# Altium PCB PCB1.PcbDoc
Units mil, origin at the board's own origin, x right, y up, seen from the top; angles counter-clockwise.
Board outline 4255 x 2150 mil, 2 copper layers (Top Layer, Bottom Layer); 68 components, 50 nets, 173 pads, 46 vias.
Unrouted connection lines stored in the file: 1.
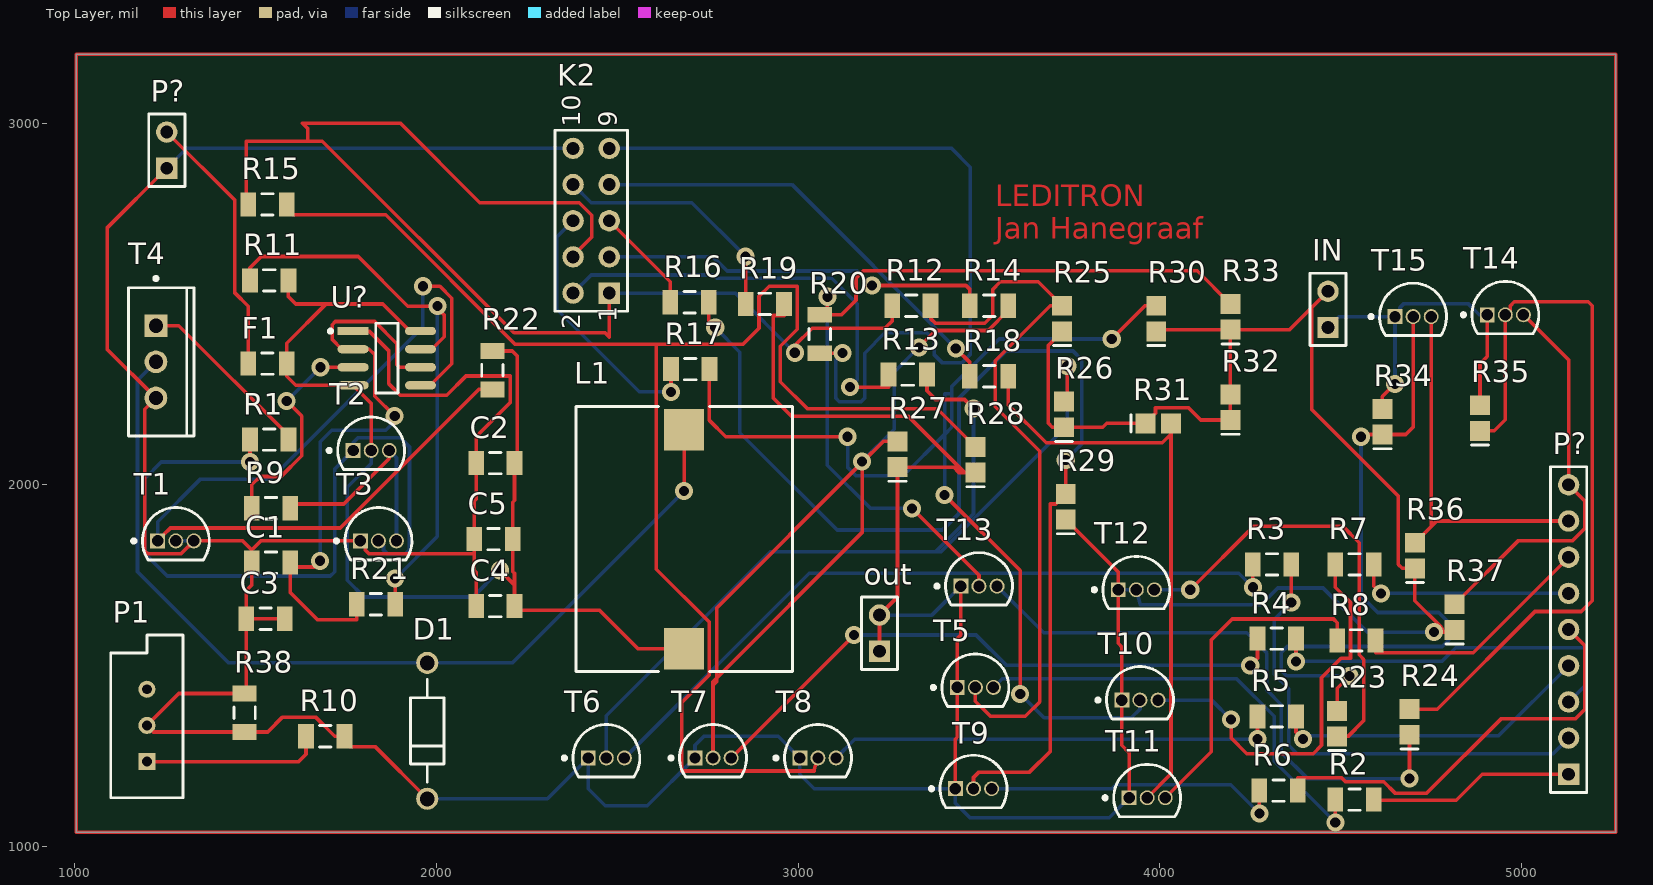
[diagram p0: Top Layer view]
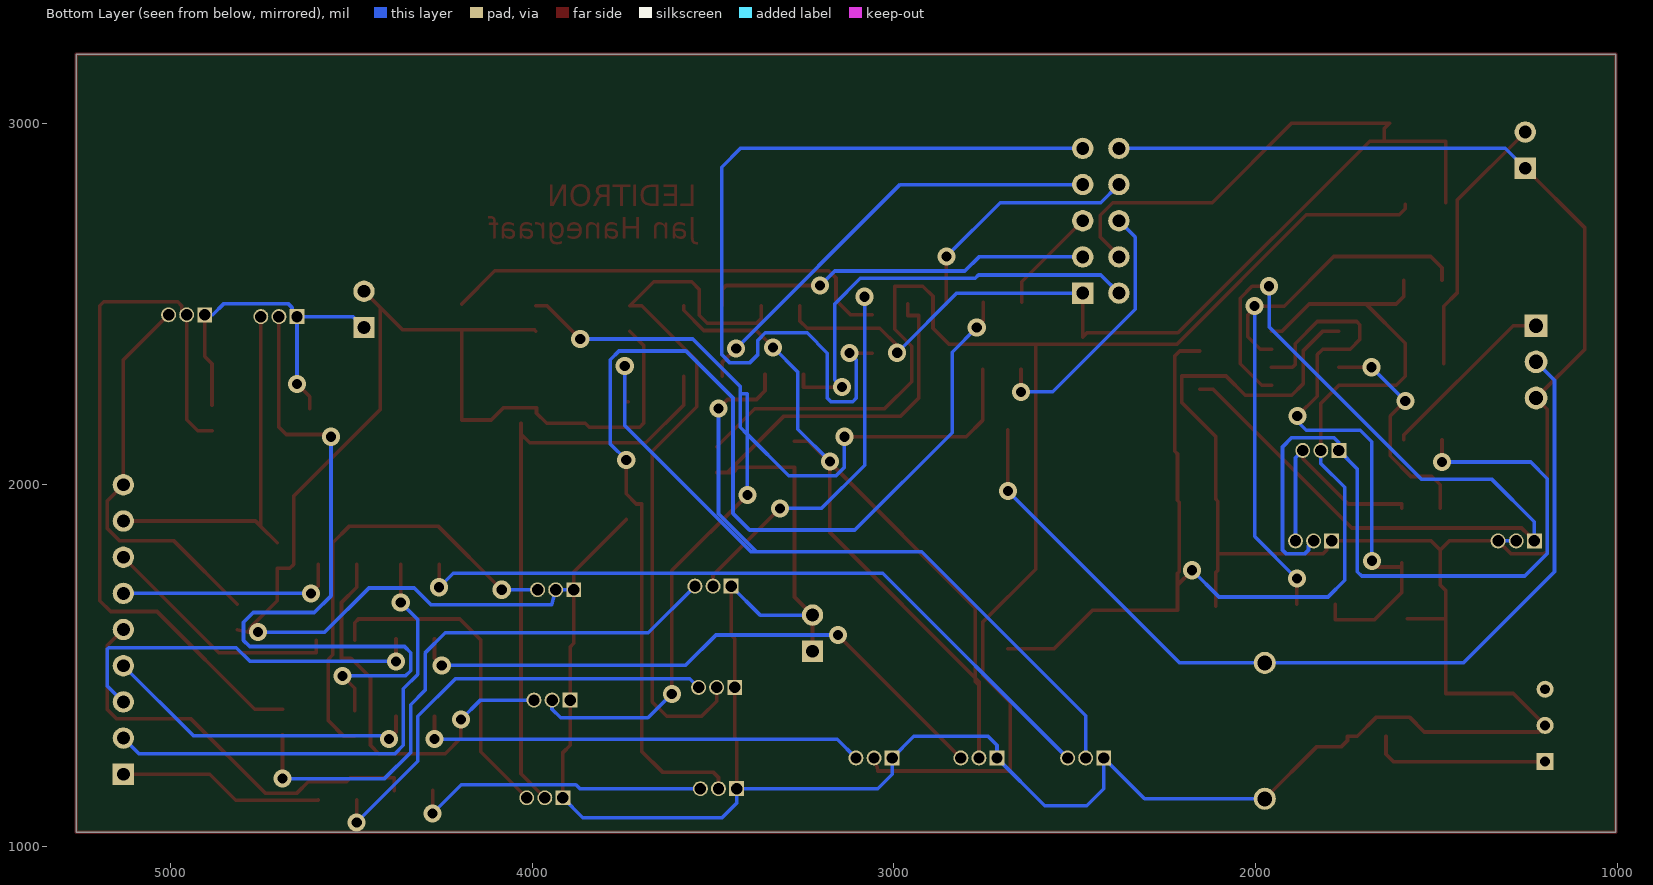
[diagram p1: Bottom Layer view, seen from below]

## Layer stack, top to bottom
Top Solder: solder mask 0.4, Solder Resist, Dk 3.5
Top Layer: signal copper 1.4
Dielectric 1: dielectric 12.6, FR-4, Dk 4.8
Bottom Layer: signal copper 1.4
Bottom Solder: solder mask 0.4, Solder Resist, Dk 3.5

## Board outline
1005,1040 1005,3190 5260,3190 5260,1040

## Design rules (kind name [scope] priority, off if disabled: settings)
Clearance [All] p1: gap=10 ignorepadtopadclearanceinfootprint=FALSE except(0: Arc-Hole Track-Hole SMDPad-Hole THPad-Hole Via-Hole Fill-Hole Poly-Hole Region-Hole Text-Hole)
PolygonConnect [All] p1: connectstyle=Relief reliefconductorwidth=10 reliefentries=4 polygonreliefangle="90 Angle" airgapwidth=10
RoutingVias [All] p1: holewidth=28 width=50 viastyle="Through Hole" minholewidth=28 minwidth=50 maxholewidth=28 maxwidth=50
SolderMaskExpansion [All] p1: expansion=4 istentingtop=FALSE
Width [All] p1: maxlimit=10 minlimit=10 preferedwidth=10
30 further rules are at their usual default settings.

## Classes and differential pairs
component class boosterdeel2: IN K2 P? R2 R3 R4 R5 R6 R7 R8 R12 R13 R14 R15 R16 R17 R18 R19 R20 R23 R24 R25 R26 R27 R28 R29 R30 R31 R32 R33 R34 R35 R36 R37 T5 T6 T7 T8 T9 T10 T11 T12 T13 T14 T15
component class booster12-70v: C1 C2 C3 C4 C5 D1 F1 L1 out P1 P? R1 R9 R10 R11 R21 R22 R38 T1 T2 T3 T4 U?

## Components (designator, comment, footprint, x,y, rotation, side; value= is the part's Value field where it differs from the comment)
C1 "Cap Semi" C1206 1543.15,1785 r0 top value=330p
C2 "Cap Semi" C1206 2163.15,2060 r0 top value=100n
C3 "Cap Semi" C1206 1528.15,1630 r0 top value=4u7
C4 "Cap Semi" C1206 2163.15,1665 r0 top value=470u
C5 "Cap Semi" C1206 2158.15,1850 r0 top value=470u
D1 "MUR160G" ONSC-AXIAL_LEAD-2-59-10_P 1975,1320 r90 top
F1 "Fuse 1" C1206 1533.15,2335 r0 top
IN "Header 2" HDR1X2 4465,2435 r90 top
K2 "Header 5X2" HDR2X5 2478.15,2530 r90 top
L1 "74459147" WE-PD3-X 2685,1850 r90 top
out "Header 2" HDR1X2 3225,1540 r90 top
P1 "RPot" VR5 1200,1335 r90 top value=5k
P? "Header 2" HDR1X2 1255,2875 r90 top
P? "Header 9" HDR1X9 5130,1200 r90 top
R1 "Res1" C1206 1538.15,2125 r0 top value=1K
R2 "Res1" C1206 4538.15,1130 r0 top value=1K
R3 "Res1" C1206 4310,1780 r0 top value=1K
R4 "Res1" C1206 4323.15,1575 r0 top value=1K
R5 "Res1" C1206 4323.15,1360 r0 top value=1K
R6 "Res1" C1206 4328.15,1155 r0 top value=1K
R7 "Res1" C1206 4538.15,1780 r0 top value=1K
R8 "Res1" C1206 4543.15,1570 r0 top value=1K
R9 "Res1" C1206 1543.15,1935 r0 top value=2k2
R10 "Res1" C1206 1693.15,1305 r0 top value=2k2
R11 "Res1" C1206 1538.15,2565 r0 top value=3k3
R12 "Res1" C1206 3313.15,2495 r0 top value=1K
R13 "Res1" C1206 3303.15,2305 r0 top value=1K
R14 "Res1" C1206 3528.15,2495 r0 top value=1K
R15 "Res1" C1206 1533.15,2775 r0 top value=1K
R16 "Res1" C1206 2700,2504.68 r0 top value=1K
R17 "Res1" C1206 2701.85,2320 r0 top value=1K
R18 "Res1" C1206 3528.15,2300 r0 top value=1K
R19 "Res1" C1206 2908.15,2500 r0 top value=1K
R20 "Res1" C1206 3060,2416.85 r90 top value=1K
R21 "Res1" C1206 1833.15,1670 r0 top value=27k
R22 "Res1" C1206 2155,2316.85 r90 top value=27k
R23 "Res1" C2512 4490,1340 r90 top value=1K
R24 "Res1" C2512 4690,1344.57 r90 top value=1K
R25 "Res1" C2512 3730,2459.57 r90 top value=1K
R26 "Res1" C2512 3735,2194.57 r90 top value=1K
R27 "Res1" C2512 3275,2084.57 r90 top value=1K
R28 "Res1" C2512 3490,2069.57 r90 top value=1K
R29 "Res1" C2512 3740,1939.57 r90 top value=1K
R30 "Res1" C2512 3990,2459.57 r90 top value=1K
R31 "Res1" C2512 3995.43,2170 r0 top value=1K
R32 "Res1" C2512 4195,2214.57 r90 top value=1K
R33 "Res1" C2512 4195,2464.57 r90 top value=1K
R34 "Res1" C2512 4615,2174.57 r90 top value=1K
R35 "Res1" C2512 4885,2184.57 r90 top value=1K
R36 "Res1" C2512 4705,1804.57 r90 top value=1K
R37 "Res1" C2512 4815,1634.57 r90 top value=1K
R38 "Res1" C1206 1470,1370 r90 top value=390k
T1 "BC547B" ONSC-TO-92-3-29-11 1280,1845 r0 top
T2 "BC639" ONSC-TO-92-3-29-11 1820,2095 r0 top
T3 "BC640-016G" ONSC-TO-92-3-29-11 1840,1845 r0 top
T4 "IPP200N15N3 G" INF-PG-TO220-3-1_A_V 1225,2340 r0 top
T5 "MPSA42" ONSC-TO-92-3-29-11 3490,1440 r0 top
T6 "MPSA42" ONSC-TO-92-3-29-11 2470,1245 r0 top
T7 "MPSA42" ONSC-TO-92-3-29-11 2765,1245 r0 top
T8 "MPSA42" ONSC-TO-92-3-29-11 3055,1245 r0 top
T9 "MPSA42" ONSC-TO-92-3-29-11 3485,1160 r0 top
T10 "MPSA42" ONSC-TO-92-3-29-11 3945,1405 r0 top
T11 "MPSA42" ONSC-TO-92-3-29-11 3965,1135 r0 top
T12 "MPSA42" ONSC-TO-92-3-29-11 3935,1710 r0 top
T13 "MPSA42" ONSC-TO-92-3-29-11 3500,1720 r0 top
T14 "MPSA92" ONSC-TO-92-3-29-11 4955,2470 r0 top
T15 "MPSA92" ONSC-TO-92-3-29-11 4700,2465 r0 top
U? "ICM7555CBAZ-T" FP-M8_15-IPC_B 1863.15,2350 r0 top

## Footprints (in the part's own frame and the unit in brackets; to place one, negate y for a bottom-side part, rotate by r counter-clockwise, add the part's x,y. Pads: shape width x height; smd on the part's side, far side on the other; paste and mask are expansions set on the pad)
C1206 [mm] "Chip Capacitor, Body 3.2x1.6mm, IPC High Density"
  rect 1.1x1.7 smd: 1(-1.35,0) 2(1.35,0)
  silkscreen extent -0.4,-0.75 0.4,0.75, body extent -1.7,-0.9 1.7,0.9, height 1.3
C2512 [mm] "Chip Capacitor, Body 2.54x1.27mm, IPC High Density"
  rect 1.4x1.4 smd: 1(-0.9,0) 2(0.9,0)
  silkscreen extent -1.9,-0.6 -1.9,0.6, body extent -1.45,-0.82 1.45,0.82, height 1.3
FP-M8_15-IPC_B [mil]
  rect 85.59x22.97 smd paste+0 mask+0: 1(-93.15,75)
  rrect100% 85.59x22.97 smd paste+0 mask+0: 2(-93.15,25) 3(-93.15,-25) 4(-93.15,-75) 5(93.15,-75) 6(93.15,-25) 7(93.15,25) 8(93.15,75)
  silkscreen extent -161,-96 31,96, body extent -146,-106 146,106, height 10
HDR1X2 [mm] "Connector; Header; 2 Position"
  rect 1.5x1.5 hole 0.9: 1(0,0)
  round 1.5 hole 0.9: 2(2.54,0)
  silkscreen extent -1.27,-1.27 3.81,1.27
HDR1X9 [mm] "Connector; Header; 9 Position"
  rect 1.5x1.5 hole 0.9: 1(0,0)
  round 1.5 hole 0.9: 2(2.54,0) 3(5.08,0) 4(7.62,0) 5(10.16,0) 6(12.7,0) 7(15.24,0) 8(17.78,0) 9(20.32,0)
  silkscreen extent -1.27,-1.27 21.59,1.27
HDR2X5 [mm] "Connector; Header; 5x2 Position"
  rect 1.5x1.5 hole 0.9: 1(0,0)
  round 1.5 hole 0.9: 2(0,2.54) 3(2.54,0) 4(2.54,2.54) 5(5.08,0) 6(5.08,2.54) 7(7.62,0) 8(7.62,2.54) 9(10.16,0) 10(10.16,2.54)
  silkscreen extent -1.27,-1.27 11.43,3.81
INF-PG-TO220-3-1_A_V [mm] "FM, 3-Leads, Body 10.03x8.98mm, Pitch 2.54mm"
  rect 1.6x1.6 hole 1: 1(0,2.54)
  round 1.6 hole 1: 2(0,0) 3(0,-2.54)
  silkscreen extent -1.93,-5.2 2.67,5.97, body extent -1.93,-5.2 2.67,5.2, height 20.75
ONSC-AXIAL_LEAD-2-59-10_P [mm] "AXIAL, 2-Leads, Diameter 2.35mm"
  round 1.55 hole 1.05: 1(-4.77,0) 2(4.77,0)
  silkscreen extent -3.6,-1.18 3.6,1.18
ONSC-TO-92-3-29-11 [mm] "TO, 3-Leads, Body Dia 4.7mm, Pitch 1.27mm"
  rect 1.05x1.05 hole 0.8: 1(-1.27,0)
  round 1.05 hole 0.8: 2(0,0) 3(1.27,0)
  silkscreen extent -3.07,-1.34 2.35,2.35, body extent -2.35,-1.33 2.36,2.36, height 7.87
VR5 [mm] "Thru-Hole; 3 Leads"
  rect 1.2x1.2 hole 0.7: 1(-2.54,0)
  round 1.2 hole 0.7: 2(0,0) 3(2.54,0)
  silkscreen extent -5.08,-2.54 6.35,2.54
WE-PD3-X [mm] "SMD Inductor, 2-Leads, Body 18.54 x 15.24 mm"
  rect 2.92x2.79 smd: 1(-7.685,0) 2(7.685,0)
  silkscreen extent -9.3,-7.6 9.3,7.6, body extent -9.27,-7.64 9.27,7.6, height 7.61

## Part data
C1 C2 C3 C4 C5: "Capacitor (Semiconductor SIM Model)", LatestRevisionDate=29-May-2009, LatestRevisionNote="IPC-7351 Footprint Added.", PackageDescription="Chip Capacitor", PackageReference=C1206, Published=8-Jun-2000, Publisher="Altium Limited"
D1: library part CMP-0902-00129-1, "SWITCHMODE(TM) Power Rectifier, 2-Pin Axial_Lead, Pb-Free, Bulk Bag", Manufacturer="On Semiconductor", ComponentLink1Description="Manufacturer URL", ComponentLink1URL=http://www.onsemi.com/, ComponentLink2Description=Datasheet, ComponentLink2URL=http://www.onsemi.com/pub_link/Collateral/MUR120-D.PDF, ComponentLink3Description="Package Specification", ComponentLink3URL=http://www.onsemi.cn/pub_link/Collateral/59-10.PDF, DatasheetVersion="Rev. 12", IFSM Max (A)=35, Mounting Technology="Through Hole", PackageDescription="2-Pin, Axial Lead, Diameter 2.35 mm", PackageReference=AXIAL_LEAD-2-59-10, PackageVersion="Rev. U, 02/2005", Packing="Bulk Bag", PartNumber=MUR160G, RoHS=TRUE, Type=Ultrafast, VRRM Max (V)=600
F1: "Fuse", LatestRevisionDate=17-Jul-2002, LatestRevisionNote="Re-released for DXP Platform.", PackageDescription="Thru-Hole; 2 Leads", PackageReference=PIN-W2/E2.8, Published=8-Jun-2000, Publisher="Altium Limited"
IN out P?: "Header, 2-Pin", LatestRevisionDate=17-Jul-2002, LatestRevisionNote="Re-released for DXP Platform.", Publisher="Altium Limited"
K2: "Header, 5-Pin, Dual row", LatestRevisionDate=17-Jul-2002, LatestRevisionNote="Re-released for DXP Platform.", Publisher="Altium Limited"
L1: library part CMP-0227-00841-1, "SMD Shielded Power Inductor WE-PD3, L = 47.0 µH", Inductance="47.0 ÂµH", ComponentLink1Description="Manufacturer Link", ComponentLink1URL=http://www.we-online.com, ComponentLink2Description=Datasheet, ComponentLink2URL=http://www.we-online.de/katalog/media/pdf/74459147.pdf, DatasheetVersion="ver 1, Oct-2004", PackageDescription="SMD Inductor, 2-Leads, Body 18.54 x 15.24 mm", PackageReference=WE-PD3-X, PackageVersion=2004
P1: "Potentiometer", LatestRevisionDate=17-Jul-2002, LatestRevisionNote="Re-released for DXP Platform.", PackageDescription="Variable Resistor, Thru-Hole; 3 Leads", PackageReference=VR5, Published=8-Jun-2000, Publisher="Altium Limited", Set Position=0.5, Sim Note="Enter the Resistance value and the set point into parameter fields."
P?: "Header, 9-Pin", LatestRevisionDate=17-Jul-2002, LatestRevisionNote="Re-released for DXP Platform.", Publisher="Altium Limited"
R1 R2 R3 R4 R5 R6 R7 R8 R9 R10 R11 R12 R13 R14 R15 R16 R17 R18 R19 R20 R21 R22 R23 R24 R25 R26 R27 R28 R29 R30 R31 R32 R33 R34 R35 R36 R37 R38: "Resistor", LatestRevisionDate=17-Jul-2002, LatestRevisionNote="Re-released for DXP Platform.", PackageDescription="Axial Device, Thru-Hole; 2 Leads; 0.3 in Pin Spacing", PackageReference=AXIAL-0.3, Published=8-Jun-2000, Publisher="Altium Limited"
T1: library part CMP-1048-01467-1, "Amplifier Transistor, NPN Silicon, 3-Pin TO-92, Bulk Box", Manufacturer="On Semiconductor", ComponentLink1Description="Manufacturer URL", ComponentLink1URL=http://www.onsemi.com/, ComponentLink2Description=Datasheet, ComponentLink2URL=http://www.onsemi.com/pub_link/Collateral/BC546-D.PDF, ComponentLink3Description="Package Specification", ComponentLink3URL=http://www.onsemi.cn/pub_link/Collateral/2N6426-D.PDF, DatasheetVersion="Rev. 7", fT Min (MHz)=150, IC Continuous (A)=0.1, Mounting Technology="Through Hole", PackageDescription="3-Pin Transistor Outline, Body 4.825 x 3.685 mm, Pitch 1.27 mm", PackageReference=TO-92-3-29-11_AM_SL, PackageVersion="Rev. AM", Packing="Bulk Box", PartNumber=BC547B, Polarity=NPN, RoHS=FALSE
T2: library part CMP-1048-01471-1, "High Current Transistor, NPN Silicon, 3-Pin TO-92, Bulk Box", Manufacturer="On Semiconductor", ComponentLink1Description="Manufacturer URL", ComponentLink1URL=http://www.onsemi.com/, ComponentLink2Description=Datasheet, ComponentLink2URL=http://www.onsemi.com/pub_link/Collateral/BC635-D.PDF, ComponentLink3Description="Package Specification", ComponentLink3URL=http://www.onsemi.cn/pub_link/Collateral/2N6426-D.PDF, DatasheetVersion="Rev. 1", IC Continuous (A)=1, Mounting Technology="Through Hole", PackageDescription="3-Pin Transistor Outline, Body 4.825 x 3.685 mm, Pitch 1.27 mm", PackageReference=TO-92-3-29-11_AM_SL, PackageVersion="Rev. AM", Packing="Bulk Box", PartNumber=BC639, Polarity=NPN, RoHS=FALSE
T3: library part CMP-1048-01475-1, "High Current Transistor, PNP Silicon, 3-Pin TO-92, Pb-Free, Bulk Box", Manufacturer="On Semiconductor", ComponentLink1Description="Manufacturer URL", ComponentLink1URL=http://www.onsemi.com/, ComponentLink2Description=Datasheet, ComponentLink2URL=http://www.onsemi.com/pub_link/Collateral/BC640-D.PDF, ComponentLink3Description="Package Specification", ComponentLink3URL=http://www.onsemi.cn/pub_link/Collateral/2N6426-D.PDF, DatasheetVersion="Rev. 1", IC Continuous (A)=-0.5, Mounting Technology="Through Hole", PackageDescription="3-Pin Transistor Outline, Body 4.825 x 3.685 mm, Pitch 1.27 mm", PackageReference=TO-92-3-29-11_AM_SL, PackageVersion="Rev. AM", Packing="Bulk Box", PartNumber=BC640-016G, Polarity=PNP, RoHS=TRUE
T4: library part CMP-1091-00080-1, "N-Channel OptiMOS 3 Power-Transistor, 150 V VDS, 50 A ID, -55 to 175 degC, PG-TO220-3-1, Tube, Green", Manufacturer=Infineon, ComponentLink1Description="Manufacturer URL", ComponentLink1URL=http://www.infineon.com/, ComponentLink2Description=Datasheet, ComponentLink2URL=http://www.infineon.com/dgdl/IPD200N15N3_Rev25.pdf?folderId=db3a304313b8b5a60113cee8763b02d7&fileId=db3a30432313ff5e01239a0457643bbc, ComponentLink3Description="Package Specification", ComponentLink3URL=http://www.infineon.com/dgdl/IPP028N08N3_Rev1%5B1%5D.0.pdf?folderId=db3a304313b8b5a60113cee8763b02d7&fileId=db3a30432313ff5e0123a3c08e7326b5, DatasheetVersion="Rev. 2.05", Green=TRUE, Halogen-free=TRUE, ID (max)="50Â A", IDpuls (max)="200Â A", Mounting Technology="Through Hole", PackageDescription="3-Pin Plastic (Green) Transistor Single Outline Package, 10.03 x 8.98 mm Body, 2.54 mm Pitch", PackageReference=PG-TO220-3-1, PackageVersion="Rev. 05, 08/2007", Packing=Tube, PartNumber="IPP200N15N3 G", Polarity=N, Ptot (max)="150Â W", QG="23Â nC", RDS (on) (max)="20Â mOhm", Rth="1Â K/W", RthJA (max)="75 K/W", RthJC (max)="1Â K/W", VDS (max)="150Â V", VGS(th) (max)="4Â V", VGS(th) (min)="2Â V"
T5 T6 T7 T8 T9 T10 T11 T12 T13: library part CMP-1048-01390-1, "High Voltage Transistor, NPN Silicon, 3-Pin TO-92, Bulk Box", Manufacturer="On Semiconductor", ComponentLink1Description="Manufacturer URL", ComponentLink1URL=http://www.onsemi.com/, ComponentLink2Description=Datasheet, ComponentLink2URL=http://www.onsemi.cn/pub_link/Collateral/MPSA42-D.PDF, ComponentLink3Description="Package Specification", ComponentLink3URL=http://www.onsemi.cn/pub_link/Collateral/2N6426-D.PDF, DatasheetVersion="Rev. 8", fT Min (MHz)=50, IC Continuous (A)=0.5, Mounting Technology="Through Hole", Note1=0, PackageDescription="3-Pin Transistor Outline, Body 4.825 x 3.685 mm, Pitch 1.27 mm", PackageReference=TO-92-3-29-11_AM_SL, PackageVersion="Rev. AM", Packing="Bulk Box", PartNumber=MPSA42, Polarity=NPN, RoHS=FALSE
T14 T15: library part CMP-1048-01411-1, "High Voltage Transistor, PNP Silicon, 3-Pin TO-92, Bulk Box", Manufacturer="On Semiconductor", ComponentLink1Description="Manufacturer URL", ComponentLink1URL=http://www.onsemi.com/, ComponentLink2Description=Datasheet, ComponentLink2URL=http://www.onsemi.cn/pub_link/Collateral/MPSA92-D.PDF, ComponentLink3Description="Package Specification", ComponentLink3URL=http://www.onsemi.cn/pub_link/Collateral/2N6426-D.PDF, DatasheetVersion="Rev. 6", fT Min (MHz)=50, IC Continuous (A)=-0.5, Mounting Technology="Through Hole", PackageDescription="3-Pin Transistor Outline, Body 4.825 x 3.685 mm, Pitch 1.27 mm", PackageReference=TO-92-3-29-11_AM_SL, PackageVersion="Rev. AM", Packing="Bulk Box", PartNumber=MPSA92, Polarity=PNP, RoHS=FALSE
U?: library part CMP-13501-000001-1, "IC OSC SINGLE TIMER 1MHZ 8-SOIC"

## Via types
v1: diameter 50, hole 28, Top Layer to Bottom Layer, 46 vias

## Nets (pads, with @x,y where several pads share a name; then routed paths per layer and width w, separated by ;. In a path a pad name is that pad's centre, name@x,y a point inside that pad or via, vN(x,y) a via of type N, cw(c..) or ccw(c..) an arc to the next point about the centre after c; other vN are vias at no path point)
+70: IN.1 R34.2 R35.2 T14.1 T15.1 | length 1014.4
  Top Layer w10: R34.2 4615,2244 v1(4650,2279) ; R35.2 4885,2335 4905,2355 T14.1
  Bottom Layer w10: IN.1 4495,2465 T15.1 ; v1(4650,2279) T15.1 ; T14.1 4883,2470 4852,2501 4675,2501 4664,2490 4664,2479 T15.1
GND: C1.1 C2.1 C3.1 C3.2 C4.1 C5.1 D1.1 IN.2 K2.10 out.1 out.2 P1.2 P?.1@1255,2875 R10.2 R19.2 R25.1 R26.1 R27.1 R28.1 R29.1 R30.1 R31.1 R32.1 R32.2 R33.1 R36.1 R37.1 R38.1 R38.2 T1.2 T1.3 T3.1 T4.3 T5.1 T6.1 T7.1 T8.1 T9.1 T10.1 T11.1 T12.1 T12.2 T13.1 U?.1 | length 15722.7
  Top Layer w10: P?.1@1255,2875 1090,2710 1090,2375 T4.3 1194.33,2209.33 1194.33,1818.12 1203.12,1809.33 1294.33,1809.33 T1.3 1465,1845 1490,1820 ; C3.2 C3.1 ; U?.1 1814,2425 1869,2370 1869,2279 1900,2248 2029,2248 2082,2301 2204,2301 2204,2227 2110,2133 C2.1 2110,1960 2105,1955 C5.1 2105,1809 ; D1.1 1830.67,1276.54 1762.95,1276.54 1746.3,1293.19 R10.2 1719,1305 1666,1358 1575.15,1358 1534,1316.85 R38.1 1218.15,1316.85 P1.2 1288.15,1423.15 R38.2 1475,1423.15 C3.1 ; C4.1 2110,1758 2105,1763 2105,1809 ; R19.2 2961.3,2468 2932,2468 2931,2467 2931,2240 2981,2190 3304.13,2190 3460,2034.13 ; out.1 out.2 3275,1690 R27.1 3430,2049.13 3445,2034.13 3460,2034.13 ; T9.1 3435,1297 3440,1302 T5.1 3440,1575 3450,1585 T13.1 ; R28.1 3460,2034.13 ; R25.1 3692,2386.13 3692,2170 3702.87,2159.13 R26.1 3842,2159.13 3852.87,2170 R31.1 3988,2198 3988,2213 4079.13,2213 4113,2179.13 R32.1 R32.2 R33.1 ; R29.1 3885,1759.13 T12.1 3885,1562 3895,1552 T10.1 3895,1280 3915,1260 T11.1 ; R30.1 3995,2429.13 R33.1 ; IN.2 4420,2490 ; v1(4758,1593) 4785.87,1593 ; R37.1 4785.87,1593 ; C3.1 1475,1708 1490,1723 C1.1 1490,1820 ; 1490,1820 1515,1845 T3.1 1804,1845 1804,1820 1815,1809 2105,1809 ; R33.1 4359.13,2429.13 4420,2490 ; 4420,2490 4420,2208 4658.87,1969.13 4658.87,1780 4669.73,1769.13 R36.1 4705,1680 4775,1610 4777.78,1605.65 4785.87,1593
  Bottom Layer w10: P?.1@1255,2875 1310,2930 K2.10 ; T1.2 T1.3 ; D1.1 2307.2,1132.2 T6.1 2420,1160 2467,1113 2583,1113 T7.1 2715,1280 2740,1305 2945,1305 T8.1 3005,1200 3045,1160 T9.1 3435,1120 3475,1080 3860,1080 T11.1 ; out.2 3370,1640 T13.1 ; T12.1 T12.2 3946,1669 4280,1669 4326,1715 4451,1715 4573,1593 v1(4758,1593)
NetC1_2: C1.2 R21.1 U?.2 U?.6 | length 1705.9
  Top Layer w10: C1.2 C1.2@1596.3,1773 ; v1(1679,1790) 1662,1773 C1.2@1596.3,1773 ; R21.1 1780,1627 1671.6,1627 1596.3,1702.3 C1.2@1596.3,1773 ; v1(1885,2190) 1829.86,2245.14 1829.86,2360 1814.86,2375 U?.2 1738.69,2375 1712.2,2401.48 1712.2,2442.7 1720.99,2451.48 1829.6,2451.48 1890.91,2390.17 1890.91,2332.6 1898.51,2325 U?.6
  Bottom Layer w10: v1(1679,1790) 1679,2119 1710.67,2150.67 1860,2150.67 1885,2175.67 v1(1885,2190)
NetD1_2: D1.2 L1.2 T4.2 | length 2583
  Top Layer w10: v1(2685,1983) L1.2
  Bottom Layer w10: T4.2 1174,2289 1174,1760 1426.2,1507.8 D1.2 2209.8,1507.8 v1(2685,1983)
NetF1_1: F1.1 P?.2@1255,2975 | length 733.2
  Top Layer w10: P?.2@1255,2975 1443.35,2786.65 1443.35,2530.32 1480,2493.67 F1.1
NetK2_1: K2.1 R12.1 | length 940.4
  Top Layer w10: v1(2991,2365) 2991,2385 3039,2433 3240,2433 3260,2453 R12.1
  Bottom Layer w10: K2.1 2826,2530 v1(2991,2365)
NetK2_2: K2.2 R13.1 | length 1219
  Top Layer w10: v1(3144,2270) 3250,2270 R13.1
  Bottom Layer w10: K2.2 2428.15,2580 2766,2580 2775,2571 3092.97,2571 3164,2499.97 3164,2290 v1(3144,2270)
NetK2_3: K2.3 R14.1 | length 1079.1
  Top Layer w10: v1(3204,2551) 3464,2551 3475,2540 R14.1
  Bottom Layer w10: K2.3 2765,2630 2804,2591 3164,2591 v1(3204,2551)
NetK2_4: K2.4 R15.1
NetK2_5: K2.5 R16.1 | length 295.2
  Top Layer w10: K2.5 2646.85,2561.3 R16.1
NetK2_6: K2.6 R17.1 | length 737.3
  Top Layer w10: R17.1 2648.7,2257.3 v1(2649,2257)
  Bottom Layer w10: K2.6 2333,2684.85 2333,2485 2561,2257 v1(2649,2257)
NetK2_7: K2.7 R18.1 | length 1238.6
  Top Layer w10: v1(3436,2377) 3475,2338 R18.1
  Bottom Layer w10: K2.7 2983,2830 v1(3436,2377)
NetK2_8: K2.8 R19.1 | length 690.3
  Top Layer w10: R19.1 v1(2855,2631)
  Bottom Layer w10: K2.8 2428.15,2780 2706,2780 v1(2855,2631)
NetK2_9: K2.9 R20.1 | length 2327.2
  Top Layer w10: R20.1 3060.3,2364 v1(3123,2364)
  Bottom Layer w10: K2.9 3424,2930 3476,2878 3476,2360 3453,2337 3399,2337 3376,2360 3376,2400 3356,2420 3240,2420 3184,2364 3184,2240 3174,2230 3114,2230 3104,2240 3104,2345 v1(3123,2364)
NetP1_1: P1.1 R10.1 | length 498.3
  Top Layer w10: P1.1 1620,1235 1640,1255 R10.1
NetP?_1: P?.1@5130,1200 R2.2 | length 570.5
  Top Layer w10: R2.2 4591.3,1128 4819,1128 4891,1200 P?.1@5130,1200
NetP?_2: P?.2@5130,1300 R3.2 | length 1337.4
  Top Layer w10: v1(4363.15,1675) R3.2
  Bottom Layer w10: v1(4363.15,1675) 4316,1627.85 4316,1476 4356,1436 4356,1280 4379,1257 5087,1257 P?.2@5130,1300
NetP?_3: P?.3 R4.2 | length 1043.6
  Top Layer w10: v1(4376,1512) 4376.3,1512.3 R4.2
  Bottom Layer w10: v1(4376,1512) 4780,1512 4818,1550 5170,1550 5175,1545 5175,1445 P?.3
NetP?_4: P?.4 R5.2 | length 889.2
  Top Layer w10: R5.2 4376.3,1316.7 v1(4396,1297)
  Bottom Layer w10: v1(4396,1297) 4405.3,1306.3 4936.3,1306.3 P?.4
NetP?_5: P?.5 R6.2 | length 1180.8
  Top Layer w10: R6.2 4381.3,1190 4502,1190 4513,1179 4619,1179 4650,1148 4738,1148 4943,1353 5148,1353 5175,1380 5175,1555 P?.5
NetP?_6: P?.6 R7.2 | length 607
  Top Layer w10: R7.2 4591.3,1720 v1(4611.3,1700)
  Bottom Layer w10: v1(4611.3,1700) P?.6
NetP?_7: P?.7 R8.2 | length 677.1
  Top Layer w10: R8.2 4596.3,1536 4866,1536 P?.7
NetP?_8: P?.8 R36.2 T15.3 | length 1029.9
  Top Layer w10: R36.2 4750,1885 ; T15.3 4750,1885 ; P?.8 4765,1900 4750,1885
NetP?_9: P?.9 R37.2 T14.3 | length 1107.4
  Top Layer w10: R37.2 4990,1845 5140,1845 5175,1880 5175,1955 P?.9 5130,2345 T14.3
NetR1_1: R1.1 T2.1 T3.2 | length 2081.7
  Top Layer w10: v1(1485,2063) R1.1
  Bottom Layer w10: v1(1485,2063) 1240,2063 1194,2017 1194,1810 1256,1748 1707,1748 1719,1760 1719,2044 T2.1 1770,2116.67 1784,2130.67 1900,2130.67 1926,2104.67 1926,1820 1915,1809 1865,1809 1854,1820 1854,1831 T3.2
NetR1_2: R1.2 T4.1 | length 503.7
  Top Layer w10: T4.1 1288.11,2440 1591.3,2136.81 R1.2
NetR2_1: R2.1 T5.3 | length 1255
  Top Layer w10: v1(4485,1067) R2.1
  Bottom Layer w10: T5.3 3564,1464 4212,1464 4316,1360 4316,1236 v1(4485,1067)
NetR3_1: R3.1 T6.3 | length 2027.9
  Top Layer w10: R3.1 4256.85,1717.15 v1(4257,1717)
  Bottom Layer w10: T6.3 3031,1756 4218,1756 v1(4257,1717)
NetR4_1: R4.1 T7.3 | length 1692.9
  Top Layer w10: T7.3 v1(3155,1585) ; v1(4250,1501) 4270,1521 R4.1
  Bottom Layer w10: v1(3155,1585) 3492,1585 3576,1501 v1(4250,1501)
NetR5_1: R5.1 T8.3 | length 1249.5
  Top Layer w10: v1(4270,1297) R5.1
  Bottom Layer w10: T8.3 3157,1297 v1(4270,1297)
NetR6_1: R6.1 T9.3 | length 840.3
  Top Layer w10: v1(4275,1092) R6.1
  Bottom Layer w10: T9.3 3868,1160 3879,1171 4196,1171 v1(4275,1092)
NetR7_1: R7.1 T10.3 | length 1118.5
  Top Layer w10: v1(4197,1351) 4197,1300 4240,1257 4424,1257 4447,1280 4447,1467 4501,1521 4527,1521 4527,1675 4485,1717 R7.1
  Bottom Layer w10: T10.3 4143,1405 v1(4197,1351)
NetR8_1: R8.1 T11.3 | length 913.8
  Top Layer w10: T11.3 4142,1262 4142,1571 4200,1629 4480,1629 4490,1619 R8.1
NetR9_1: R9.1 U?.3 | length 627.1
  Top Layer w10: R9.1 1490,2000 1513,2023 1571,2023 1628,2080 1628,2190 v1(1586.5,2231.5) ; v1(1680,2325) U?.3
  Bottom Layer w10: v1(1586.5,2231.5) v1(1680,2325)
NetR9_2: R9.2 T2.3 T3.3 | length 618.2
  Top Layer w10: R9.2 1596.3,1947 1744,1947 1870,2073 T2.3
  Bottom Layer w10: T2.3 1890,2075 T3.3
NetR11_1: R11.1 R21.2 U?.7 | length 1669.6
  Top Layer w10: R11.1 1485,2600 1516,2631 1784,2631 1921,2494 v1@1997.72,2494 ; R21.2 v1(1886.3,1740.7) ; U?.7 1987.62,2375 2022.12,2409.51 2022.12,2469.59 v1@1997.72,2494 ; v1(2003,2494) v1@1997.72,2494
  Bottom Layer w10: v1(1886.3,1740.7) 2003,1857.4 v1(2003,2494)
NetR12_2: R12.2 R25.2 T5.2 | length 2013.1
  Top Layer w10: R12.2 3366.3,2460 3379.77,2446.53 3516,2446.53 3538,2468.53 3538,2540 3559,2561 3664,2561 R25.2 3697,2495 3544.64,2342.64 3544.64,2216.08 3668,2092.73 3668,1400 3628,1360 3532,1360 3490,1402 T5.2
NetR13_2: R13.2 R26.2 T6.2 | length 2627.9
  Top Layer w10: R13.2 3356.3,2259.7 3380,2236 3460,2236 v1(3485,2211) ; R26.2 3744,2230 v1(3744,2328)
  Bottom Layer w10: T6.2 2470,1362 2923,1815 3380,1815 ; v1(3485,2211) 3485,1920 3380,1815 ; v1(3744,2328) 3744,2164 3395,1815 3380,1815
NetR14_2: R14.2 R27.2 T7.2 | length 2581.5
  Top Layer w10: T7.2 2765,1446.08 ; v1(3177,2065) v1@3177,2061.77 ; R27.2 3235.23,2120 v1@3177,2061.77 ; v1(3334,2380) 3380.53,2426.53 3525.53,2426.53 3581.3,2482.3 R14.2 ; 2765,1446.08 2765,1456 2774.92,1465.92 ; 2765,1446.08 2774.92,1456 2774.92,1465.92 ; 2774.92,1465.92 3177,1868 v1@3177,2061.77 ; 2774.92,1465.92 2774.92,1659.69 v1@3177,2061.77
  Bottom Layer w10: v1(3177,2065) 3266.05,2154.05 3266.05,2312.05 v1(3334,2380)
NetR15_2: R15.2 R28.2 T8.2 | length 4268.2
  Top Layer w10: R15.2 1586.3,2763.19 1602.96,2746.54 1860.18,2746.54 2218.56,2388.15 2608,2388.15 ; T8.2 3044,1209 2679,1209 2679,1399.08 2754.92,1475 2754.92,1620 2608,1766.92 2608,2388.15 ; R28.2 3385,2210 3026,2210 2951,2285 2951,2383.47 2998,2430.47 2998,2549 2920,2549 2892,2521 2892,2433 2847.15,2388.15 2608,2388.15
NetR16_2: R16.2 R29.2 T9.2 | length 3255.2
  Top Layer w10: R16.2 2753.15,2452.7 v1(2771,2434.85) ; T9.2 3485,1191 3500,1206 3640,1206 3697,1263 3697,1947 3712,1947 R29.2 v1(3740,2069)
  Bottom Layer w10: v1(2771,2434.85) 2839,2366.85 2839,2144 3108,1875 3399,1875 3445,1921 3445,2240 3575,2370 3760,2370 3784,2346 3784,2113 v1(3740,2069)
NetR17_2: R17.2 R30.2 T10.2 | length 3080.7
  Top Layer w10: R17.2 2755,2178 2800,2133 v1(3137,2133) ; v1(3405,1972) 3614,1763 v1(3614,1422) ; v1(3867,2403) 3959,2495 R30.2
  Bottom Layer w10: v1(3137,2133) 3137,2048 3160,2025 3291,2025 3405,2139 ; v1(3405,1972) 3405,2139 ; v1(3614,1422) 3680,1356 3921,1356 3945,1380 T10.2 ; v1(3867,2403) 3556.11,2403 3425,2271.89 3425,2251.89 ; 3405,2139 3405,2251.89 3425,2251.89 ; 3405,2139 3425,2159 3425,2251.89
NetR18_2: R18.2 R31.2 T11.2 | length 1644.6
  Top Layer w10: R18.2 3581.3,2220.43 3685.73,2116 4007,2116 4030.87,2139.87 ; T11.2 3965,1135.44 4030.87,1201.31 4030.87,2139.87 ; R31.2 4030.87,2139.87
NetR20_2: R20.2 R33.2 T13.2 | length 2350.4
  Top Layer w10: R20.2 R20.2@3081,2470 ; v1(3081,2520) R20.2@3081,2470 ; v1(3315,1935) 3500,1750 T13.2 ; R33.2 4103.34,2591.66 3180,2591.66 3160,2571.66 3160,2510 3120,2470 R20.2@3081,2470
  Bottom Layer w10: v1(3081,2520) 3081,2054 3200,1935 v1(3315,1935)
NetR22_1: R22.1 T1.1 U?.5 | length 2606.2
  Top Layer w10: T1.1 1245.67,1860.67 1245.67,1861.11 1265.23,1880.67 1734.4,1880.67 2117.43,2263.7 R22.1 ; U?.5 1983,2275 2043,2335 2043,2516 2010,2549 v1(1963,2549)
  Bottom Layer w10: T1.1 1230,1898 1347,2015 1541,2015 1963,2437 v1(1963,2549)
NetR23_1: R23.1 T12.3 | length 1247
  Top Layer w10: v1(4084,1710) 4260,1886 4505,1886 4551,1840 4551,1530 4564,1517 4564,1348.57 4520,1304.57 R23.1
  Bottom Layer w10: T12.3 v1(4084,1710)
NetR23_2: R23.2 R34.1 T15.2 | length 2053.5
  Top Layer w10: R23.2 4490,1438 v1(4524,1472) ; v1(4556,2133) 4562.13,2139.13 R34.1 4680,2139.13 4700,2159.13 T15.2
  Bottom Layer w10: v1(4524,1472) 4350,1472 4336,1486 4336,1536 4353,1553 4781,1553 4798,1570 4798,1620 4771,1647 4602,1647 4556,1693 v1(4556,2133)
NetR24_1: R24.1 T13.3 | length 1619.2
  Top Layer w10: v1(4690,1188) R24.1
  Bottom Layer w10: T13.3 3679,1591 4240,1591 4296,1535 4296,1432 4336,1392 4336,1260 4408,1188 v1(4690,1188)
NetR24_2: R24.2 R35.1 T14.2 | length 2083
  Top Layer w10: R24.2 4767,1380 5037,1650 5165,1650 5195,1680 5195,2495 5184,2506 4980,2506 4969,2495 4969,2484 T14.2 4955,2180 4924.13,2149.13 R35.1
VCC: C2.2 C4.2 C5.2 F1.2 L1.1 R11.2 R22.2 T2.2 U?.4 U?.8 | length 3301.9
  Top Layer w10: R11.2 1591.3,2520 1611.3,2500 1695,2500 ; T2.2 1820,2225 U?.4 1611.3,2275 1586.3,2300 F1.2 1586.3,2391.3 1695,2500 ; U?.8 1926.79,2425 1851.79,2500 1695,2500 ; R22.2 2210,2370 2224,2356 2224,2093 2216.3,2085.3 C2.2 2216.3,1957 2211.3,1952 C5.2 2211.3,1760 2216.3,1755 2216.3,1723.4 ; v1(2175.7,1764) 2216.3,1723.4 ; L1.1 2556.56,1547.44 2451,1653 2216.3,1653 C4.2 2216.3,1723.4
  Bottom Layer w10: T2.2 1820,2059 1754,1993 1754,1736 1800,1690 2101.7,1690 v1(2175.7,1764)
pads on no net: P1.3
copper on no net: | length 15422.8
  Top Layer w10: 1475,2780 1475,2950 1685,2950 2215,2420 2466.3,2420 2478.15,2408.15 2478.15,2530 ; 1645,2955 1645,2985 1630,3000 1900,3000 2120,2780 2395,2780 2430,2745 2430,2685 2378.15,2633.15 2378.15,2630 ; 1005,1040 5260,1040 5260,3190 1005,3190 1005,1040

## Other copper
Top Layer:
  text "LEDITRON / Jan Hanegraaf" at 3545,2680 h60

## Text inside footprints (layer, text, board x,y; h text height)
K2: Top Overlay "10" at 2398.15,2990 h50 r90; Top Overlay "9" at 2498.15,2990 h50 r90; Top Overlay "1" at 2498.15,2450 h50 r90; Top Overlay "2" at 2398.15,2430 h50 r90